# Altium PCB motorController.PcbDoc
Units mm, origin at the board's own origin, x right, y up, seen from the top; angles counter-clockwise.
Board outline 83.82 x 53.34 mm, 2 copper layers (Top Layer, Bottom Layer); 41 components, 84 nets, 182 pads, 0 vias.
Unrouted connection lines stored in the file: 2.
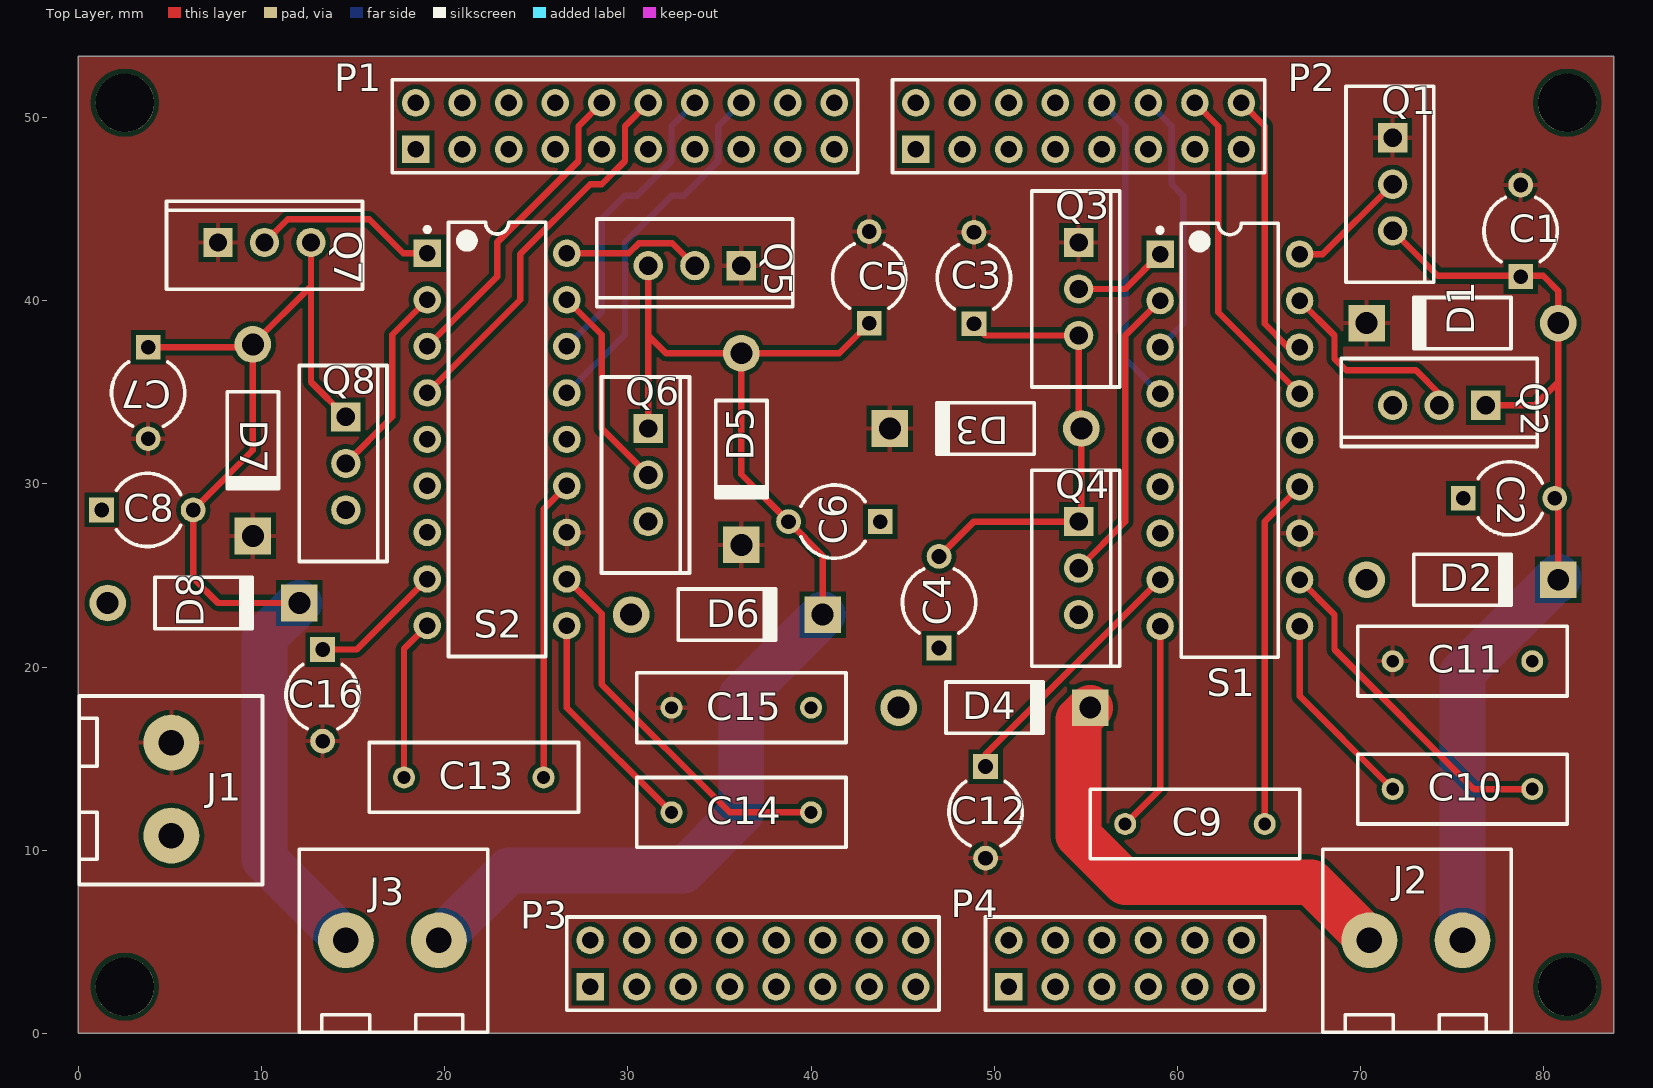
[diagram p0: Top Layer view]
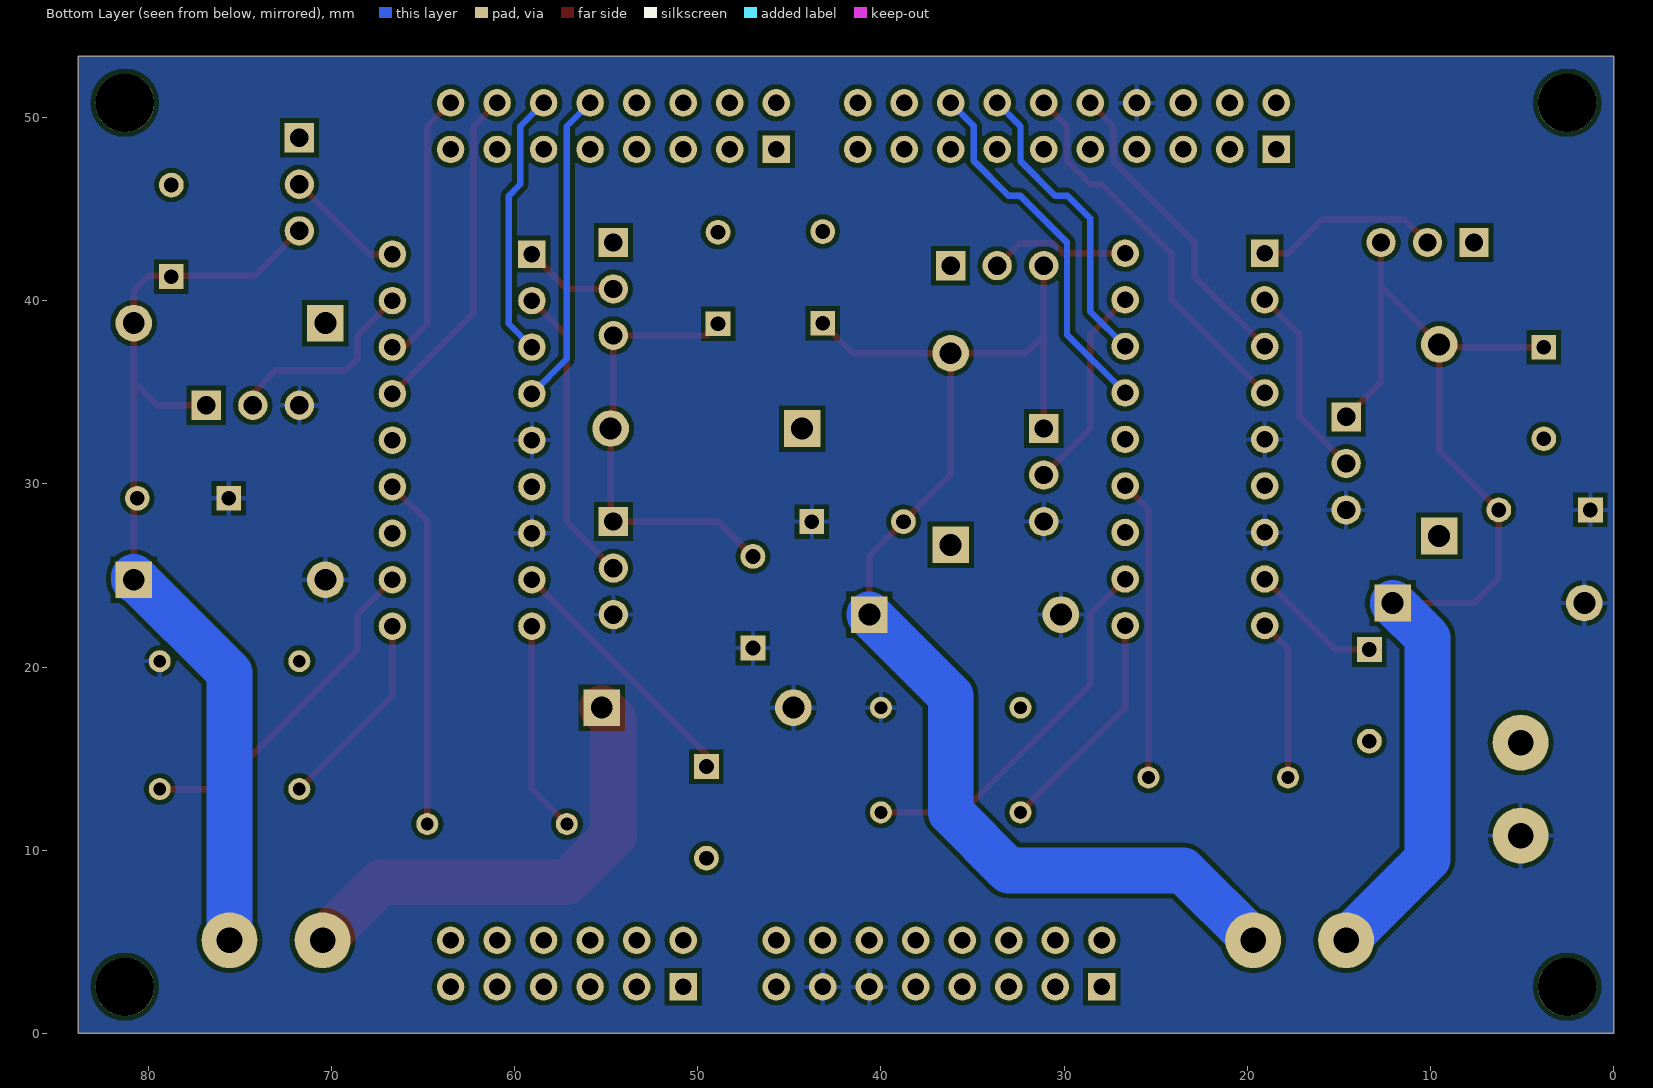
[diagram p1: Bottom Layer view, seen from below]

## Layer stack, top to bottom
Top Solder: solder mask 0.0102, Solder Resist, Dk 3.5
Top Layer: signal copper 0.0356
Dielectric1: dielectric 0.32, FR-4, Dk 4.8
Bottom Layer: signal copper 0.0356
Bottom Solder: solder mask 0.0102, Solder Resist, Dk 3.5

## Board outline
0,0 0,53.34 63.5,53.34 83.82,53.34 83.82,0 66.04,0

## Design rules (kind name [scope] priority, off if disabled: settings)
Clearance [All] p1: gap=0.254
HoleSize [All] p1: absolutevalues=TRUE maxlimit=5 minlimit=0.025 maxpercent=80.000 minpercent=20.000
PolygonConnect [All] p1: connectstyle=Relief reliefconductorwidth=0.254 reliefentries=4 polygonreliefangle="90 Angle" airgapwidth=0.254
RoutingVias [All] p1: holewidth=0.711 width=1.27 viastyle="Through Hole" minholewidth=0.711 minwidth=1.27 maxholewidth=0.711 maxwidth=1.27
SilkToSolderMaskClearance SilkscreenOverComponentPads [IsPad] p1: minsilkscreentomaskgap=0.254 clearancetoexposedcopper=TRUE
SolderMaskExpansion [All] p1: expansion=0.102
Width ThickWidth [All] p1: maxlimit=3 minlimit=0.254 preferedwidth=0.35 minimp=50.000000 maximp=50.000000 favimp=50.000000
28 further rules are at their usual default settings.

## Components (designator, comment, footprint, x,y, rotation, side; value= is the part's Value field where it differs from the comment)
C1 "Cap2" CAPR5-4X5 78.74,43.815 r90 top
C2 "Cap2" CAPR5-4X5 78.105,29.21 r0 top
C3 "Cap2" CAPR5-4X5 48.895,41.235 r90 top
C4 "Cap2" CAPR5-4X5 46.99,23.535 r90 top
C5 "Cap2" CAPR5-4X5 43.18,41.275 r90 top
C6 "Cap2" CAPR5-4X5 41.275,27.94 r180 top
C7 "Cap2" CAPR5-4X5 3.81,34.965 r270 top
C8 "Cap2" CAPR5-4X5 3.77,28.575 r0 top
C9 "Cap" RAD-0.3 60.96,11.43 r0 top
C10 "Cap" RAD-0.3 75.565,13.335 r0 top
C11 "Cap" RAD-0.3 75.565,20.32 r0 top
C12 "Cap2" CAPR5-4X5 49.53,12.065 r270 top
C13 "Cap" RAD-0.3 21.59,13.97 r0 top
C14 "Cap" RAD-0.3 36.195,12.065 r0 top
C15 "Cap" RAD-0.3 36.195,17.78 r0 top
C16 "Cap2" CAPR5-4X5 13.335,18.455 r270 top
D1 "Diode 1N4004" DO-41 75.565,38.775 r180 top
D2 "Diode 1N4004" DO-41 75.565,24.765 r0 top
D3 "Diode 1N4004" DO-41 49.53,33.02 r180 top
D4 "Diode 1N4004" DO-41 50.015,17.78 r0 top
D5 "Diode 1N4004" DO-41 36.195,31.9 r270 top
D6 "Diode 1N4004" DO-41 35.41,22.86 r0 top
D7 "Diode 1N4004" DO-41 9.525,32.385 r270 top
D8 "Diode 1N4004" DO-41 6.835,23.495 r0 top
J1 "282857-2" 282857-2 5.08,15.875 r180 top
J2 "282857-2" 282857-2 70.485,5.08 r270 top
J3 "282857-2" 282857-2 14.605,5.08 r270 top
P1 "Header 10X2" HDR2X10 18.415,48.26 r0 top
P2 "Header 8X2" HDR2X8 45.72,48.26 r0 top
P3 "Header 8X2" HDR2X8 27.94,2.54 r0 top
P4 "Header 6X2" HDR2X6 50.8,2.54 r0 top
Q1 "SCR" TO-220-AB 71.755,46.355 r270 top
Q2 "SCR" TO-220-AB 74.295,34.29 r180 top
Q3 "SCR" TO-220-AB 54.61,40.64 r270 top
Q4 "SCR" TO-220-AB 54.61,25.4 r270 top
Q5 "SCR" TO-220-AB 33.655,41.91 r180 top
Q6 "SCR" TO-220-AB 31.115,30.48 r270 top
Q7 "SCR" TO-220-AB 10.16,43.18 r0 top
Q8 "SCR" TO-220-AB 14.605,31.115 r270 top
S1 "MAX620" DIP-18 62.865,32.385 r0 top
S2 "MAX620" DIP-18 22.86,32.425 r0 top

## Footprints (in the part's own frame and the unit in brackets; to place one, negate y for a bottom-side part, rotate by r counter-clockwise, add the part's x,y. Pads: shape width x height; smd on the part's side, far side on the other; paste and mask are expansions set on the pad)
282857-2 [mil] "TE CONNECTIVITY / BUCHANAN  282857-2  Wire-To-Board Terminal Block, 2, 300 V, 24 A, 30 AWG, 12 AWG, 3 mm²"
  round 120 hole 55: 1(0,0) 2(0,200)
  silkscreen extent -196,-100 198,305, body extent -196,-100 198,320, height 752
CAPR5-4X5 [mm] "Capacitor; 2 Leads"
  rect 1.35x1.35 hole 0.8: 1(-2.5,0)
  round 1.35 hole 0.8: 2(2.5,0)
  silkscreen extent -1.69,-2 1.82,2
DIP-18 [mm] "DIP; 18 Leads; Row Spacing 7.62 mm; Pitch 2.54 mm"
  rect 1.5x1.5 hole 0.9: 1(-3.81,10.16)
  round 1.5 hole 0.9: 2(-3.81,7.62) 3(-3.81,5.08) 4(-3.81,2.54) 5(-3.81,0) 6(-3.81,-2.54) 7(-3.81,-5.08) 8(-3.81,-7.62) 9(-3.81,-10.16) 10(3.81,-10.16) 11(3.81,-7.62) 12(3.81,-5.08) 13(3.81,-2.54) 14(3.81,0) 15(3.81,2.54) 16(3.81,5.08) 17(3.81,7.62) 18(3.81,10.16)
  silkscreen extent -3.93,-11.85 2.65,11.85, body extent -3.6,-11.8 3.6,11.8, height 5.08
DO-41 [mm] "Diode, Axial; Body 5.2 x 2.7 mm (LxDia. max), Lead Dia. 0.86 mm (max)"
  round 2 hole 1.2: 1(-5.23,0)
  rect 2x2 hole 1.2: 2(5.23,0)
  silkscreen extent -2.65,-1.4 2.75,1.4
HDR2X6 [mm] "Connector; Header; 6x2 Position"
  rect 1.5x1.5 hole 0.9: 1(0,0)
  round 1.5 hole 0.9: 2(0,2.54) 3(2.54,0) 4(2.54,2.54) 5(5.08,0) 6(5.08,2.54) 7(7.62,0) 8(7.62,2.54) 9(10.16,0) 10(10.16,2.54) 11(12.7,0) 12(12.7,2.54)
  silkscreen extent -1.27,-1.27 13.97,3.81
HDR2X8 [mm] "Connector; Header; 8x2 Position"
  rect 1.5x1.5 hole 0.9: 1(0,0)
  round 1.5 hole 0.9: 2(0,2.54) 3(2.54,0) 4(2.54,2.54) 5(5.08,0) 6(5.08,2.54) 7(7.62,0) 8(7.62,2.54) 9(10.16,0) 10(10.16,2.54) 11(12.7,0) 12(12.7,2.54) 13(15.24,0) 14(15.24,2.54) 15(17.78,0) 16(17.78,2.54)
  silkscreen extent -1.27,-1.27 19.05,3.81
HDR2X10 [mm] "Connector; Header; 10x2 Position"
  rect 1.5x1.5 hole 0.9: 1(0,0)
  round 1.5 hole 0.9: 2(0,2.54) 3(2.54,0) 4(2.54,2.54) 5(5.08,0) 6(5.08,2.54) 7(7.62,0) 8(7.62,2.54) 9(10.16,0) 10(10.16,2.54) 11(12.7,0) 12(12.7,2.54) 13(15.24,0) 14(15.24,2.54) 15(17.78,0) 16(17.78,2.54) 17(20.32,0) 18(20.32,2.54) 19(22.86,0) 20(22.86,2.54)
  silkscreen extent -1.27,-1.27 24.13,3.81
RAD-0.3 [mm] "Radial Cap, Thru-Hole; 2 Leads; 0.3 in Pin Spacing"
  round 1.2 hole 0.7: 1(-3.81,0) 2(3.81,0)
  silkscreen extent -5.71,-1.91 5.71,1.91
TO-220-AB [mm] "TO, Thru-Hole, Vertical, Heatsink Mounted; 3 In-Line Leads; Pitch 2.54 mm"
  rect 1.6x1.6 hole 1: 1(-2.54,0)
  round 1.6 hole 1: 2(0,0) 3(2.54,0)
  silkscreen extent -5.35,-2.55 5.35,2.25

## Part data
C1 C2 C3 C4 C5 C6 C7 C8 C9 C10 C11 C12 C13 C14 C15 C16: "Capacitor"
D1 D2 D3 D4 D5 D6 D7 D8: "1 Amp General Purpose Rectifier"
P1: "Header, 10-Pin, Dual row"
P2 P3: "Header, 8-Pin, Dual row"
P4: "Header, 6-Pin, Dual row"
Q1 Q2 Q3 Q4 Q5 Q6 Q7 Q8: "Silicon Controlled Rectifier"
S1 S2: library part "SW DIP-9", "DIP Switch, 9 Position, SPST"

## Free pads (board coordinates)
  round 3.2 hole 3.2: 0(2.54,2.54) 0(2.54,50.8) 0(81.28,2.54) 0(81.28,50.8)

## Nets (pads, with @x,y where several pads share a name; then routed paths per layer and width w, separated by ;. In a path a pad name is that pad's centre, name@x,y a point inside that pad or via, vN(x,y) a via of type N, cw(c..) or ccw(c..) an arc to the next point about the centre after c; other vN are vias at no path point)
3V3: P3.3 P3.7
"5-9 VIN": P3.15
5V/USB: P3.9
AREF: P1.6
GND: C2.1 C4.1 C6.1 C8.1 C11.2 C15.2 D2.1 D4.1 D6.1 D8.1 J1.2 P1.8 P3.11 P3.13 Q2.3 Q4.3 Q6.3 Q8.3 S1.5 S1.7 S2.5 S2.7
"LM 1": Q1.2 S1.18 | length 6.7
  Top Layer w0.35: S1.18 67.945,42.545 Q1.2
"LM 2": Q2.2 S1.17 | length 11.1
  Top Layer w0.35: S1.17 68.58,38.1 68.58,36.83 69.215,36.195 73.025,36.195 74.295,34.925 Q2.2
"LM 3": Q3.2 S1.1 | length 5.2
  Top Layer w0.35: Q3.2 57.15,40.64 S1.1
"LM 4": Q4.2 S1.2 | length 16.4
  Top Layer w0.35: Q4.2 57.15,27.94 57.15,38.1 S1.2
M1+: C1.1 C2.2 D1.1 D2.2 J2.2 Q1.3 Q2.1 | length 52.8
  Top Layer w0.35: Q1.3 74.215,41.355 79.97,41.355 80.795,40.53 D1.1 80.795,37.02 80.795,35.56 ; Q2.1 79.525,34.29 80.795,35.56 ; D2.2 80.795,35.56
  Bottom Layer w2.5: J2.2 75.565,19.685 80.795,24.915 D2.2
M1-: C3.1 C4.2 D3.1 D4.2 J2.1 Q3.3 Q4.1 | length 50.2
  Top Layer w0.35: C4.2 48.895,27.94 Q4.1 54.76,28.09 D3.1 54.61,33.17 Q3.3 49.53,38.1 C3.1
  Top Layer w2.5: D4.2 54.61,17.145 54.61,10.795 57.15,8.255 67.31,8.255 J2.1
M2+: C5.1 C6.2 D5.1 D6.2 J3.2 Q5.3 Q6.1 | length 70.2
  Top Layer w0.35: Q6.1 31.115,38.1 ; Q5.3 31.115,38.1 ; D6.2 40.64,26.075 C6.2 36.195,30.52 36.195,31.83 D5.1 ; C5.1 41.535,37.13 D5.1 ; 31.115,38.1 32.085,37.13 D5.1
  Bottom Layer w2.5: J3.2 23.495,8.89 33.02,8.89 36.195,12.065 36.195,18.415 D6.2
M2-: C7.1 C8.2 D7.1 D8.2 J3.1 Q7.3 Q8.1 | length 62.1
  Top Layer w0.35: C7.1 9.375,37.465 D7.1 ; D8.2 7.62,23.495 6.27,24.845 C8.2 9.525,31.83 D7.1 ; Q7.3 12.7,40.79 ; Q8.1 12.7,35.56 12.7,40.79 ; D7.1 12.7,40.79
  Bottom Layer w2.5: D8.2 10.16,21.59 10.16,9.525 J3.1
NC: P1.5
NetC9_1: C9.1 S1.9 | length 11.6
  Top Layer w0.35: C9.1 59.055,13.335 S1.9
NetC9_2: C9.2 S1.13 | length 19.2
  Top Layer w0.35: C9.2 64.77,27.94 S1.13
NetC10_1: C10.1 S1.10 | length 10.5
  Top Layer w0.35: S1.10 66.675,18.415 C10.1@71.438,13.652
NetC10_2: C10.2 S1.11 | length 18.6
  Top Layer w0.35: S1.11 68.58,22.86 68.58,20.955 76.2,13.335 C10.2
NetC12_1: C12.1 S1.8 | length 14.1
  Top Layer w0.35: C12.1 49.53,15.24 S1.8
NetC13_1: C13.1 S2.9 | length 8.8
  Top Layer w0.35: C13.1 17.78,20.995 S2.9
NetC13_2: C13.2 S2.13 | length 16.4
  Top Layer w0.35: C13.2 25.4,28.615 S2.13
NetC14_1: C14.1 S2.10 | length 12.6
  Top Layer w0.35: S2.10 26.67,17.78 C14.1
NetC14_2: C14.2 S2.11 | length 20.9
  Top Layer w0.35: S2.11 28.575,22.9 28.575,19.05 35.56,12.065 C14.2
NetC16_1: C16.1 S2.8 | length 7.3
  Top Layer w0.35: C16.1 15.2,20.955 S2.8
PTA1: P2.14 S1.15 | length 18.2
  Top Layer w0.35: P2.14 62.23,49.53 62.23,39.37 S1.15
PTA2: P2.16 S1.16 | length 15
  Top Layer w0.35: P2.16 64.77,49.53 64.77,38.735 66.04,37.465 S1.16
PTA4: P2.8
PTA5: P2.6
PTA12: P2.10 S1.4 | length 17.2
  Bottom Layer w0.35: P2.10 57.15,49.53 57.15,36.83 S1.4
PTA13: P1.20
PTA16: P1.11
PTA17: P1.9
PTA20/RESET: P3.5
PTB0: P4.1
PTB1: P4.3
PTB2: P4.5
PTB3: P4.7
PTB8: P3.2
PTB9: P3.4
PTB10: P3.6
PTB11: P3.8
PTC0: P2.13
PTC1: P4.11
PTC2: P4.9
PTC3: P2.11
PTC4: P2.9
PTC5: P2.7
PTC6: P2.5
PTC7: P2.15
PTC8: P2.4
PTC9: P2.2
PTC10: P2.3
PTC11: P2.1
PTC12: P1.19
PTC13: P1.17
PTC16: P1.15
PTC17: P1.13
PTD0: P1.16 S2.15 | length 20.2
  Bottom Layer w0.35: S2.15 29.845,38.14 29.845,43.18 32.385,45.72 33.02,45.72 34.925,47.625 34.925,49.53 P1.16
PTD1: P1.10 S2.3 | length 17.2
  Top Layer w0.35: S2.3 22.86,41.315 22.86,43.18 27.305,47.625 27.305,49.53 P1.10
PTD2: P1.14 S2.16 | length 16.6
  Bottom Layer w0.35: S2.16 28.575,39.41 28.575,44.49 29.805,45.72 30.48,45.72 32.385,47.625 32.385,49.53 P1.14
PTD3: P1.12 S2.4 | length 21.2
  Top Layer w0.35: S2.4 24.13,40.045 24.13,42.545 27.94,46.355 28.575,46.355 29.845,47.625 29.845,49.53 P1.12
PTD4: P2.12 S1.3 | length 14.7
  Bottom Layer w0.35: P2.12 59.69,49.53 59.69,46.355 60.325,45.72 60.325,38.735 S1.3
PTD5: P1.18
PTD6: P1.3
PTD7: P1.1
PTE0: P1.4
PTE1: P1.2
PTE2: P3.10
PTE3: P3.12
PTE4: P3.14
PTE5: P3.16
PTE20: P4.2
PTE21: P4.4
PTE22: P4.6
PTE23: P4.8
PTE29: P4.10
PTE30: P4.12
PTE31: P1.7
"RM 1": Q5.2 S2.18 | length 7.7
  Top Layer w0.35: S2.18 30.052,42.585 30.606,43.139 32.426,43.139 Q5.2
"RM 2": Q6.2 S2.17 | length 11.4
  Top Layer w0.35: S2.17 28.575,38.14 28.575,33.02 Q6.2
"RM 3": Q7.2 S2.1 | length 10.2
  Top Layer w0.35: Q7.2 11.43,44.45 15.875,44.45 17.74,42.585 S2.1
"RM 4": Q8.2 S2.2 | length 10.8
  Top Layer w0.35: Q8.2 17.145,33.655 17.145,38.14 S2.2
SDA_PTD5: P3.1
VCC: C1.2 C3.2 C5.2 C7.2 C11.1 C12.2 C15.1 C16.2 D1.2 D3.2 D5.2 D7.2 J1.1 Q1.1 Q3.1 Q5.1 Q7.1 S1.12 S2.12
pads on no net: S1.6 S1.14 S2.6 S2.14

## Polygon pours and split planes (outlines as drawn)
GND on Bottom Layer "Top Layer-GND" (solid, pour order 10): 0,53.34 83.82,53.34 83.82,0 0,0
VCC on Top Layer "Top Layer-VCC" (solid, pour order 12): 0,53.34 83.82,53.34 83.82,0 0,0 0,53.34

## Silkscreen, mask and mechanical layers (free items; w line width, h text height)
Top Overlay:
  text "RESET" at 32.893,-63.881 h0.51 r45
  text "3v3" at 35.433,-63.881 h0.51 r45
  text "5v" at 37.973,-63.881 h0.51 r45
  text "GND" at 40.513,-63.881 h0.51 r45
  text "GND" at 43.053,-63.881 h0.51 r45
  text "Vin" at 45.593,-63.881 h0.51 r45
Mechanical 1:
  circle w0.127: c2.54,50.8 r1.6
  circle w0.127: c81.28,2.54 r1.6
  circle w0.127: c2.54,2.54 r1.6
  circle w0.127: c81.28,50.8 r1.6